# Altium PCB motorcontroller updated (1).PcbDoc
Units mil, origin at the board's own origin, x right, y up, seen from the top; angles counter-clockwise.
Board outline 3211.75 x 2684.86 mil, 2 copper layers (Top Layer, Bottom Layer), stack 15.3 mil thick; 36 components, 77 nets, 186 pads, 23 vias.
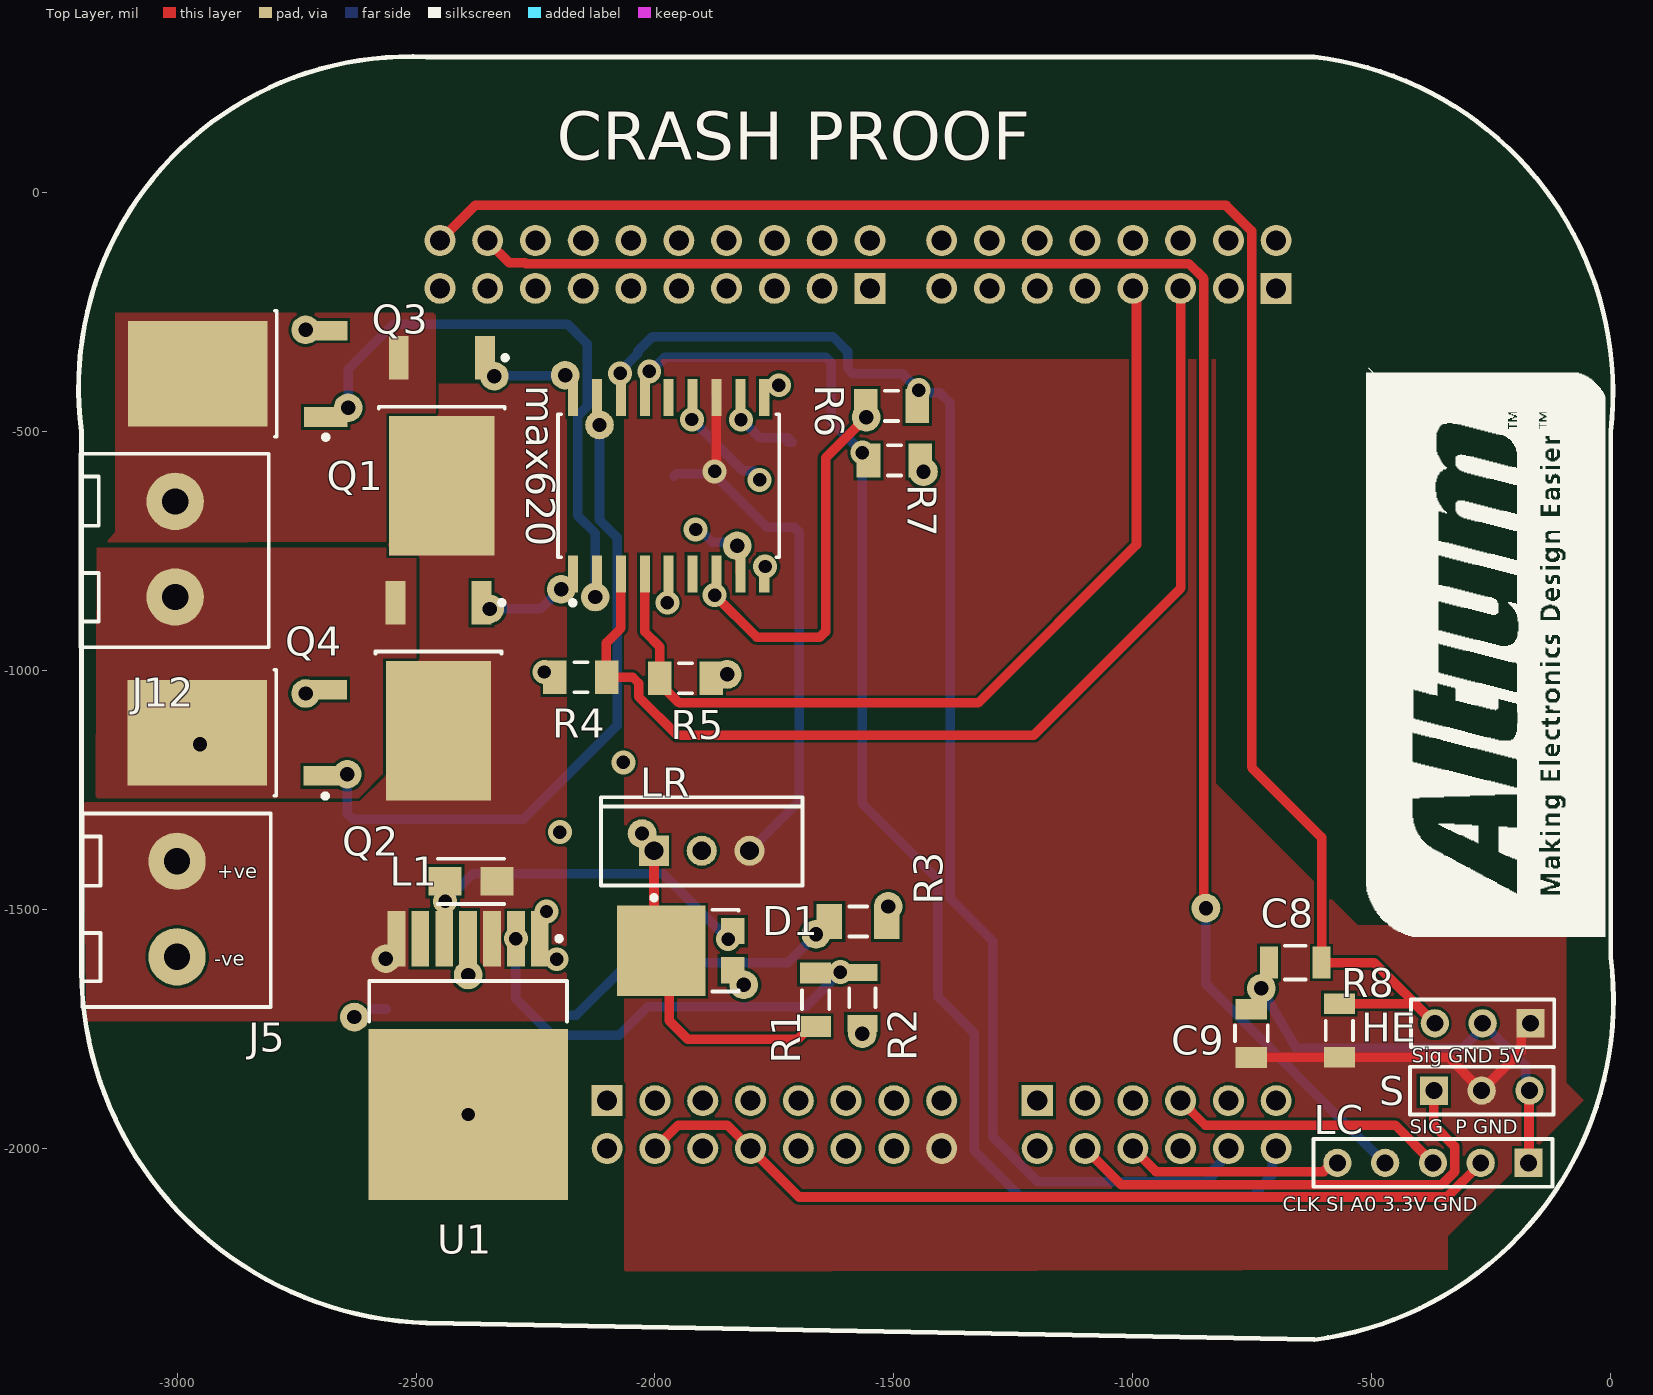
[diagram p0: Top Layer view]
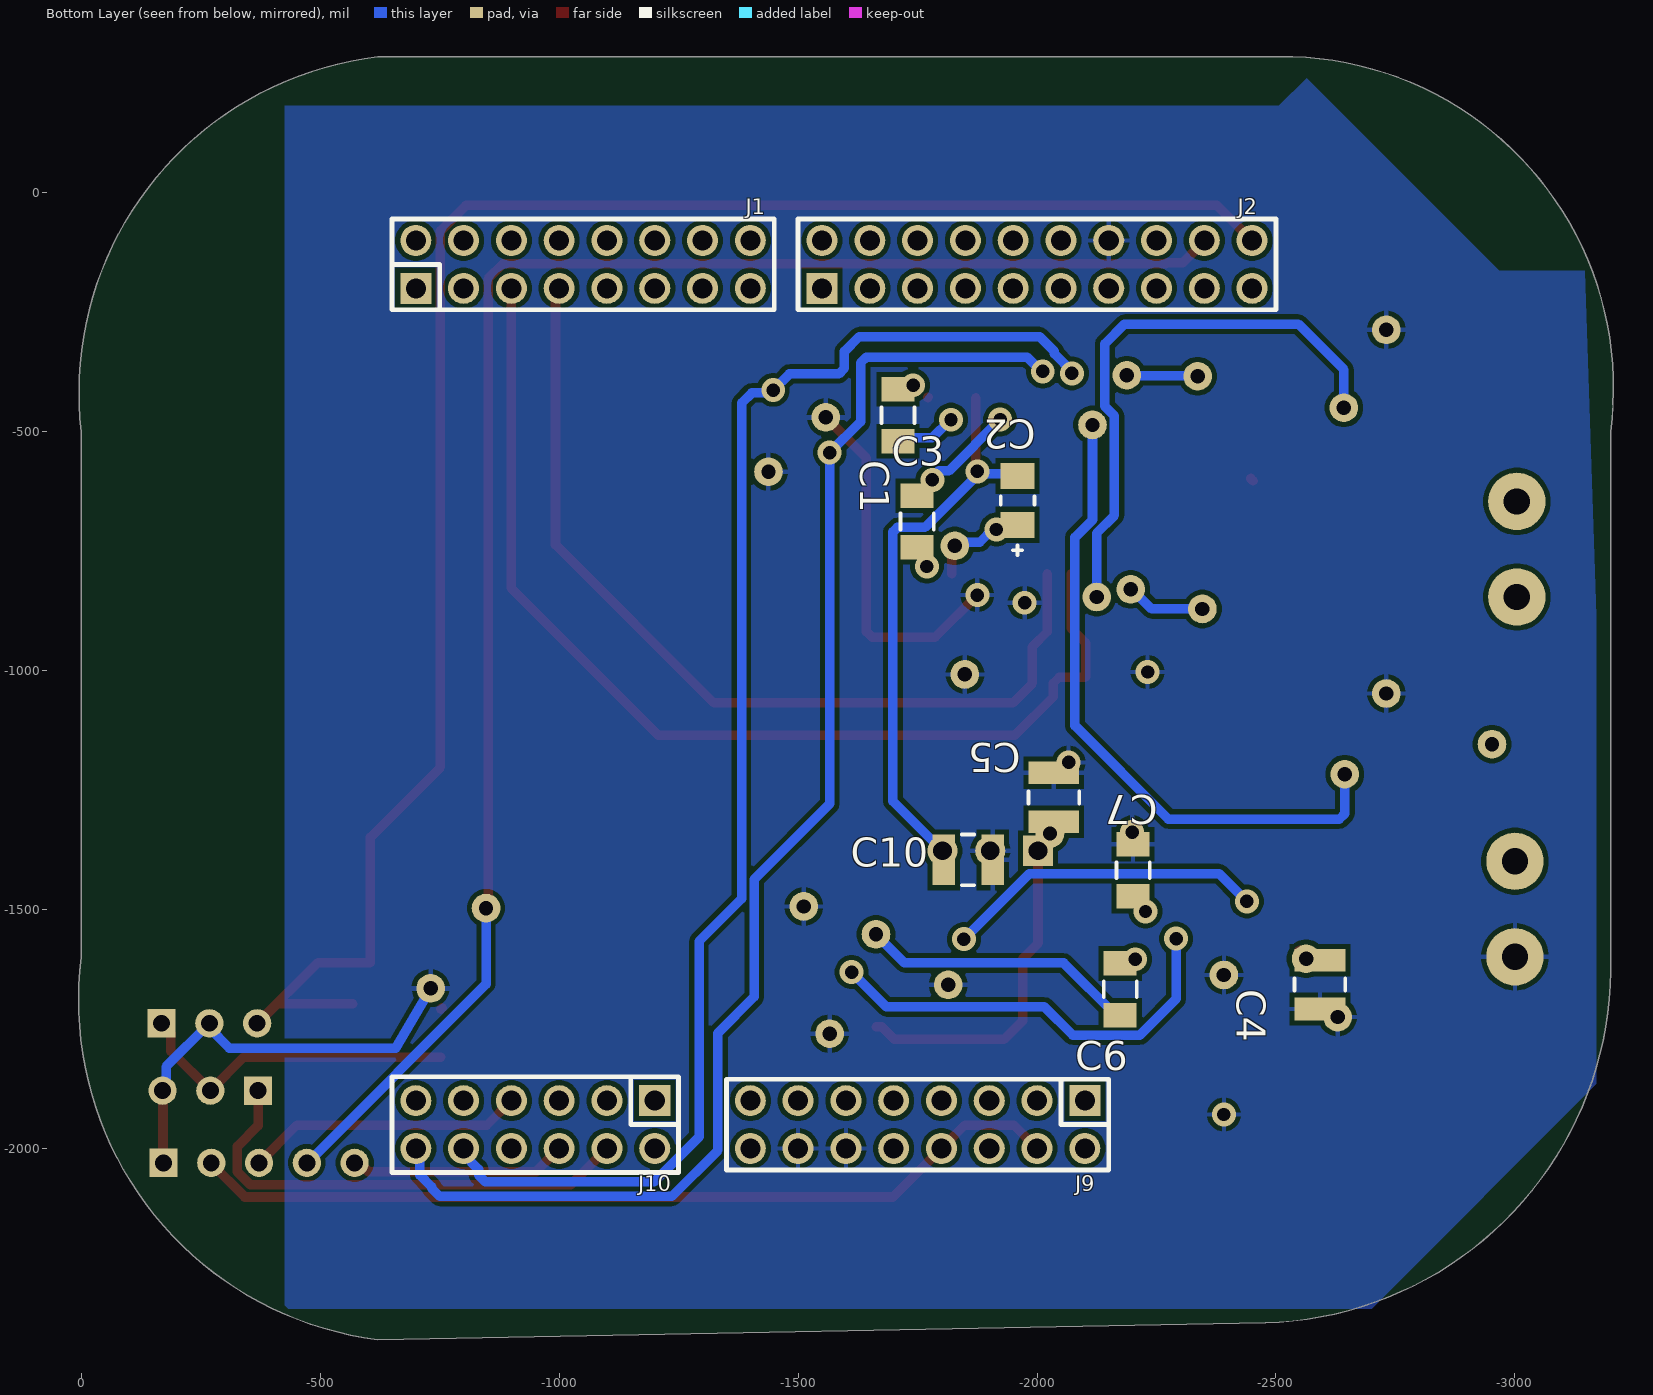
[diagram p1: Bottom Layer view, seen from below]
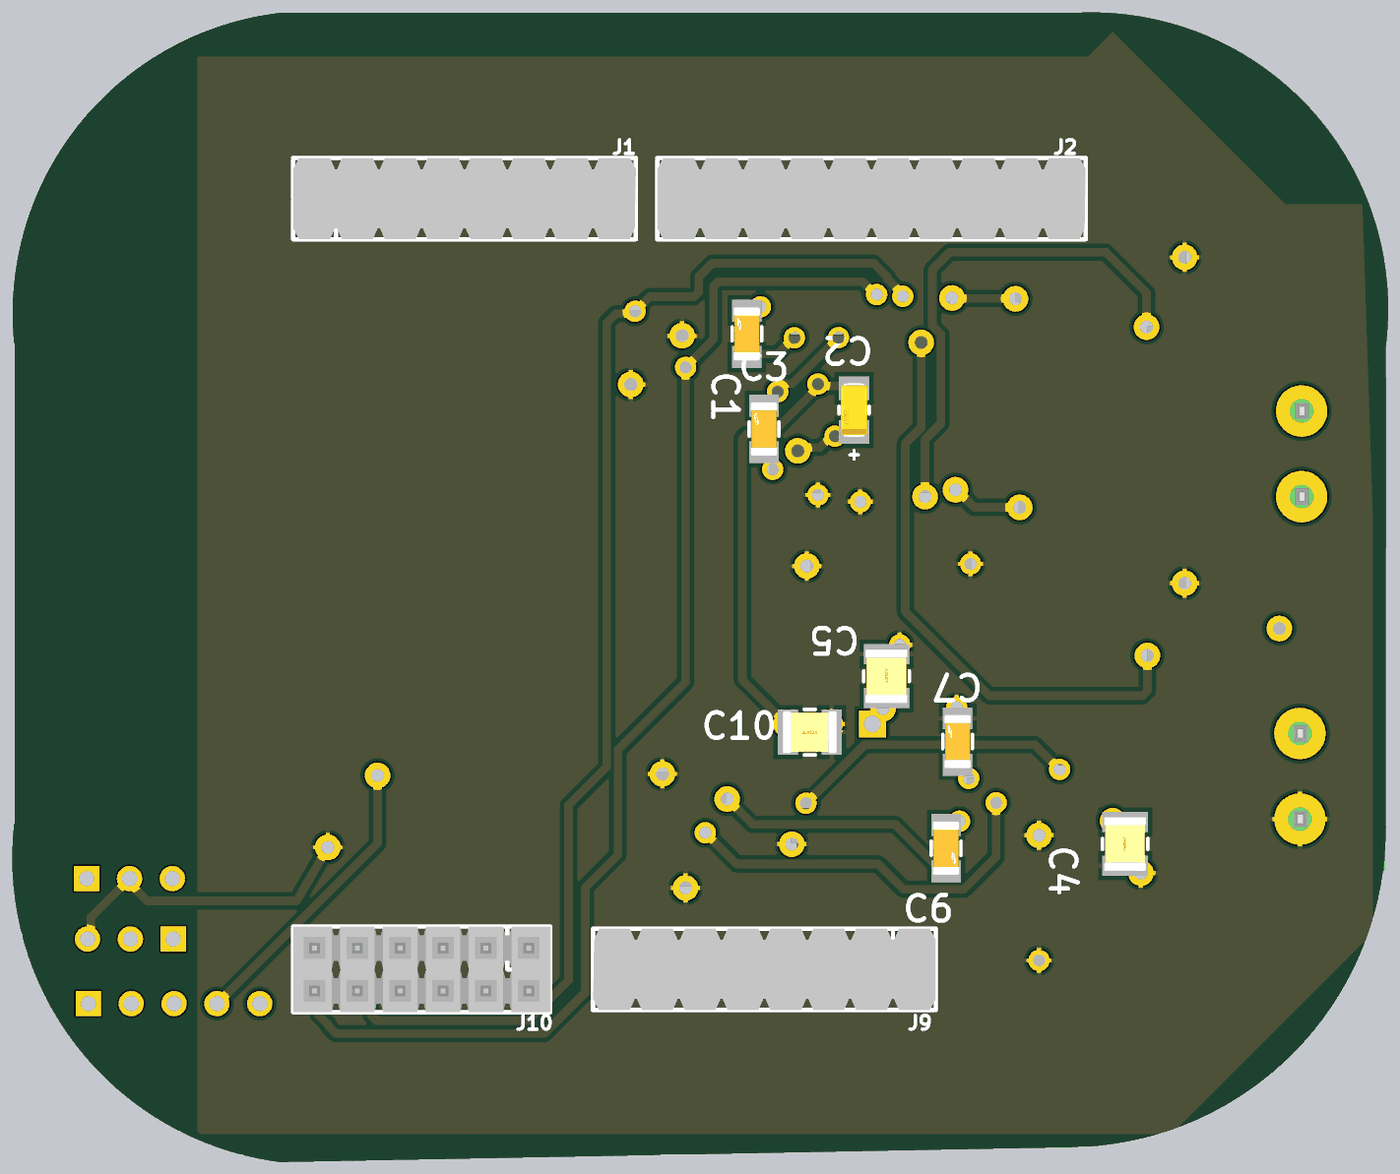
[diagram p2: 3D render of the assembled board from below, using the file's embedded part models]

## Layer stack, top to bottom
Top Solder: solder mask 0.4, Solder Resist, Dk 3.5
Top Layer: signal copper 1.4
Dielectric1: core 12.5, FR-4, Dk 4.8
Bottom Layer: signal copper 1.4
Bottom Solder: solder mask 0.4, Solder Resist, Dk 3.5

## Board outline
-3200,-1600 ccw(c-2456.51,-1621.51) -2478.02,-2365 -620.19,-2400 ccw(c-710.1,-1689.91) 0,-1600 0,-500 ccw(c-702.09,-418.09) -620.19,284 -989,284 -1736,284 -2478.02,284 ccw(c-2513.25,-407.99) -3200,-500

## Design rules (kind name [scope] priority, off if disabled: settings)
Clearance Polygon [(InNet('GND') AND InPoly)] p1: gap=10 ignorepadtopadclearanceinfootprint=FALSE except(0: Arc-Hole Track-Hole SMDPad-Hole THPad-Hole Via-Hole Fill-Hole Poly-Hole Region-Hole Text-Hole)
Clearance [All] p2: gap=6 ignorepadtopadclearanceinfootprint=FALSE except(0: Arc-Hole Track-Hole SMDPad-Hole THPad-Hole Via-Hole Fill-Hole Poly-Hole Region-Hole Text-Hole)
ComponentClearance [All] p1: gap=0 collisioncheckmode=3 verticalgap=0 showdistances=FALSE
Height [All] p1: minheight=0 maxheight=1500 prefheight=500
HoleSize [All] p1: absolutevalues=TRUE maxlimit=250 minlimit=1 maxpercent=80.000 minpercent=20.000
HoleToHoleClearance [All] p1: gap=2 allowstackedmicrovias=TRUE
MinimumSolderMaskSliver [All] p1: minsoldermaskwidth=0
PlaneConnect [All] p1: planeconnectstyle=Direct reliefexpansion=20 reliefentries=4 reliefconductorwidth=10 reliefairgap=10
PolygonConnect PolygonConnect_2 [InNet('GND')] p1: connectstyle=Relief reliefconductorwidth=10 reliefentries=4 polygonreliefangle="90 Angle" airgapwidth=10
PolygonConnect [All] p2: connectstyle=Direct reliefconductorwidth=10 reliefentries=4 polygonreliefangle="90 Angle" airgapwidth=10
RoomDefinition Connectors [InComponentClass('Connectors')] p1: confinementstyle=ConfineIn formatcopy=TRUE lockcomponents=FALSE outline -27484.74,-25608.65 -25484.74,-25608.65 -25484.74,-24608.65 -27484.74,-24608.65
RoutingVias [All] p1: holewidth=12 width=24 viastyle="Through Hole" minholewidth=12 minwidth=24 maxholewidth=50 maxwidth=100
ShortCircuit ShortCircuit_1 [HasFootprint('4-40 X 250') vs HasFootprint('4-40 X 250')] p1: allowed=TRUE
ShortCircuit [All] p2: allowed=FALSE
SilkToSilkClearance [All] p1: silktosilkclearance=0
SilkToSolderMaskClearance SilkscreenOverComponentPads [IsPad] p1: minsilkscreentomaskgap=0 clearancetoexposedcopper=TRUE
SolderMaskExpansion [All] p1: expansion=4 istentingtop=FALSE
Width [All] p1: maxlimit=100 minlimit=20 preferedwidth=20 minimp=50.000000 maximp=50.000000 favimp=50.000000 checkconnectedcopper=TRUE
21 further rules are at their usual default settings.

## Classes and differential pairs
component class "motorcontroller updated": C1 C2 C3 C4 C5 C6 C7 C8 C9 C10 D1 HE J12 L1 LC LR max620 Q1 Q2 Q3 Q4 R1 R2 R3 R4 R5 R6 R7 R8 S U1
component class Connectors: D6 J1 J2 J5 J9 J10 R18

## Components (designator, comment, footprint, x,y, rotation, side; value= is the part's Value field where it differs from the comment)
C1 "CL31B473KCCNNNC" FP-CL31-IPC_B -1709.09,-465.81 r90 bottom
C2 "TAJA105K025RNJ" FP-TAJA-MFG -1959.31,-644 r270 bottom
C3 "CL31B473KCCNNNC" FP-CL31-IPC_B -1749,-688 r90 bottom
C4 "C1210C226K4PACTU" FP-C1210C226K4PACTU-MFG -2592,-1657 r90 bottom
C5 "C1210C226K4PACTU" FP-C1210C226K4PACTU-MFG -2035,-1265.18 r270 bottom
C6 "CL31B473KBCNNNC" FP-CL31-IPC_B -2174,-1667 r270 bottom
C7 "CL31B473KBCNNNC" FP-CL31-IPC_B -2201,-1417.81 r90 bottom
C8 "C1206C472K5RACTU" FP-C1206C-EB-MFG -660,-1611 r180 top value="4,700 pF"
C9 "100nf" FP-CL31-IPC_C -752,-1759.1 r90 top value=100nF
C10 "C1210C226K4PACTU" FP-C1210C226K4PACTU-MFG -1856,-1396 r0 bottom
D1 "V10P10-M3/86A" FP-95570-MFG -1946.06,-1586 r90 top
HE "Header 3" HDR1X3 -168,-1738 r180 top
J1 "67996-416HLF" 67996-416HLF -1050,-150 r180 bottom locked
J2 "67996-420HLF" 67996-420HLF -2000,-150 r180 bottom locked
J5 "282857-2" 282857-2 -3000,-1399 r180 top
J9 "67996-416HLF" 67996-416HLF -1750,-1950 r0 bottom locked
J10 "67996-412HLF" 67996-412HLF -950,-1950 r0 bottom locked
J12 "" 282857-2 -3004,-646 r180 top value=282857-2
L1 "LQH31CN100K03L" FP-LQH31CN_03-MFG -2385,-1441 r180 top
LC "Header 5" HDR1X5 -172,-2030 r180 top
LR "LM2940CT-5.0/NOPB" NDE0003A -1902,-1377 r0 top
max620 "MAX620CWN+" FP-W18-1-MFG -1971.31,-613.18 r90 top
Q1 "" INF-PG-TO252-3-11_A_M -2446,-530.32 r270 top
Q2 "" INF-PG-TO252-3-11_A_M -2453,-1043 r270 top
Q3 "" INF-PG-TO252-3-11_A_M -2874,-379 r180 top
Q4 "" INF-PG-TO252-3-11_A_M -2875,-1130 r180 top
R1 "ERJ-8ENF53R6V" RESC3216X70X50NL05T20 -1664,-1688.85 r270 top
R2 "CRCW12066K80FKEA" RESC3216X60X45LL10T20 -1566,-1685 r270 top
R3 "CRCW12062K00FKEA" FP-CRCW1206-e3-IPC_A -1574.92,-1525 r0 top value=2kR
R4 "CRCW120610K0FKEAHP" RESC3116X65X50NL20T20 -2155.13,-1014 r180 top
R5 "CRCW120610K0FKEAHP" RESC3116X65X50NL20T20 -1936,-1016 r180 top
R6 "CRCW120610K0FKEAHP" RESC3116X65X50NL20T20 -1505,-446 r0 top
R7 "CRCW120610K0FKEAHP" RESC3116X65X50NL20T20 -1499,-560 r0 top
R8 "ERJ8ENF2201V" RESC3216X70X50NL05T20 -568,-1753.1 r270 top
S "Header 3" HDR1X3 -370,-1879 r0 top
U1 "LT1370CR#PBF" LT-R-7_L -2391,-1805 r270 top

## Footprints (in the part's own frame and the unit in brackets; to place one, negate y for a bottom-side part, rotate by r counter-clockwise, add the part's x,y. Pads: shape width x height; smd on the part's side, far side on the other; paste and mask are expansions set on the pad)
67996-412HLF [mil] "CONN HEADER 12POS .100 STR TIN"
  rect 65x65 hole 42: 1(-250,-50)
  round 65 hole 42: 2(-250,50) 3(-150,-50) 4(-150,50) 5(-50,-50) 6(-50,50) 7(50,-50) 8(50,50) 9(150,-50) 10(150,50) 11(250,-50) 12(250,50)
  silkscreen extent -300,-100 300,100, body extent -300,-100 300,100, height 331
67996-416HLF [mil] "CONN HEADER 16POS .100 STR TIN"
  rect 65x65 hole 42: 1(-350,-50)
  round 65 hole 42: 2(-350,50) 3(-250,-50) 4(-250,50) 5(-150,-50) 6(-150,50) 7(-50,-50) 8(-50,50) 9(50,-50) 10(50,50) 11(150,-50) 12(150,50) 13(250,-50) 14(250,50) 15(350,-50) 16(350,50)
  silkscreen extent -400,-95 400,95, body extent -400,-95 400,95, height 305
67996-420HLF [mil] "CONN HEADER 20POS .100 STR TIN"
  rect 65x65 hole 42: 1(-450,-50)
  round 65 hole 42: 2(-450,50) 3(-350,-50) 4(-350,50) 5(-250,-50) 6(-250,50) 7(-150,-50) 8(-150,50) 9(-50,-50) 10(-50,50) 11(50,-50) 12(50,50) 13(150,-50) 14(150,50) 15(250,-50) 16(250,50) 17(350,-50) 18(350,50) 19(450,-50) 20(450,50)
  silkscreen extent -500,-95 500,95, body extent -500,-95 500,95, height 305
282857-2 [mil] "TE CONNECTIVITY / BUCHANAN  282857-2  Wire-To-Board Terminal Block, 2, 300 V, 24 A, 30 AWG, 12 AWG, 3 mm²"
  round 120 hole 55: 1(0,0) 2(0,200)
  silkscreen extent -196,-100 198,305, body extent -196,-100 198,320, height 752
FP-95570-MFG [mm]
  rect 1.4x1.27 smd paste+0 mask+0: 1(1.04,-2.765) 2(-1.04,-2.765)
  rect 4.8x4.72 smd paste+0 mask+0: K(0,1.04)
  silkscreen extent -2.17,-3.08 2.17,-1.7, body extent -2.5,-3.5 2.5,3.5, height 0.25
FP-C1206C-EB-MFG [mm]
  rect 0.95x1.7 smd paste+0 mask+0: 1(-1.4,0) 2(1.4,0)
  silkscreen extent -0.55,-0.9 0.55,0.9, body extent -2,-1 2,1, height 0.25
FP-C1210C226K4PACTU-MFG [mm]
  rect 1.2x2.7 smd paste+0 mask+0: 1(-1.3,0) 2(1.3,0)
  silkscreen extent -0.33,-1.35 0.33,1.35, body extent -1.6,-1.25 1.6,1.25, height 2.8
FP-CL31-IPC_B [mil]
  rect 51.4x69.22 smd paste+0 mask+0: 1(-54.19,0) 2(54.19,0)
  silkscreen extent -17,-35 17,35, body extent -63,-31 63,31, height 55
FP-CL31-IPC_C [mil]
  rect 43.52x65.28 smd paste+0 mask+0: 1(-50.25,0) 2(50.25,0)
  silkscreen extent -17,-34 17,34, body extent -76,-38 76,38, height 10
FP-CRCW1206-e3-IPC_A [mil]
  rect 53.39x73.16 smd paste+0 mask+0: 1(-60.08,0) 2(60.08,0)
  silkscreen extent -19,-31 19,31, body extent -63,-31 63,31, height 24
FP-LQH31CN_03-MFG [mm]
  rect 1.75x1.5 smd paste+0 mask+0: 1(-1.375,0) 2(1.375,0)
  silkscreen extent -1.75,-1.2 1.75,1.2, body extent -2.35,-1 2.35,1, height 0.25
FP-TAJA-MFG [mm]
  rect 1.4x1.8 smd paste+0 mask+0: 1(-1.3,0) 2(1.3,0)
  silkscreen extent -0.23,-0.9 2.9,0.9, body extent -1.6,-0.8 1.6,0.8, height 1.8
FP-W18-1-MFG [mil]
  rect 77.99x20.98 smd paste+0 mask+0: 1(-184.51,200) 2(-184.51,150) 3(-184.51,100) 4(-184.51,50) 5(-184.51,0) 6(-184.51,-50) 7(-184.51,-100) 8(-184.51,-150) 9(-184.51,-200) 10(184.51,-200) 11(184.51,-150) 12(184.51,-100) 13(184.51,-50) 14(184.51,0) 15(184.51,50) 16(184.51,100) 17(184.51,150) 18(184.51,200)
  silkscreen extent -250,-231 150,231, body extent -227,-238 227,238, height 10
HDR1X3 [mm] "Connector; Header; 3 Position"
  rect 1.5x1.5 hole 0.9: 1(0,0)
  round 1.5 hole 0.9: 2(2.54,0) 3(5.08,0)
  silkscreen extent -1.27,-1.27 6.35,1.27
HDR1X5 [mm] "Connector; Header; 5 Position"
  rect 1.5x1.5 hole 0.9: 1(0,0)
  round 1.5 hole 0.9: 2(2.54,0) 3(5.08,0) 4(7.62,0) 5(10.16,0)
  silkscreen extent -1.27,-1.27 11.43,1.27
INF-PG-TO252-3-11_A_M [mm] "DPAK, 3-Leads, Body 6.57x6.1mm, Pitch 2.29mm, IPC Low Density"
  rect 2.3x1.05 smd: 1(-4.7,2.29) 3(-4.7,-2.29)
  rect 7.4x5.6 smd: 2(2.1,0)
  silkscreen extent -4.82,-3.35 -2,3.49, body extent -2.1,-3.37 4.12,3.37, height 2.41
LT-R-7_L [mm] "DPAK, 7-Leads, Body 10.224x8.89mm, Pitch 1.27mm, IPC High Density"
  rect 2.95x0.95 smd: 1(-6.2,3.81) 2(-6.2,2.54) 3(-6.2,1.27) 4(-6.2,0) 5(-6.2,-1.27) 6(-6.2,-2.54) 7(-6.2,-3.81)
  rect 9.1x10.6 smd: 8(3.15,0)
  silkscreen extent -6.32,-5.25 -1.8,5.25, body extent -3.95,-5.28 5.45,5.28, height 4.58
NDE0003A [mm] "FM, 3-Leads, Body 10.7x4.7mm, Pitch 2.54mm"
  rect 1.6x1.6 hole 1: 1(-2.54,0)
  round 1.6 hole 1: 2(0,0) 3(2.54,0)
  silkscreen extent -5.35,-2.62 5.35,2.85, body extent -5.4,-1.9 5.4,2.9, height 19.4
RESC3116X65X50NL20T20 [mm] "Chip Resistor, 2-Leads, Body 3.10x1.60mm, IPC Medium Density"
  rect 1.25x1.8 smd: 1(-1.375,0) 2(1.375,0)
  silkscreen extent -0.35,-0.8 0.35,0.8, body extent -1.65,-0.9 1.65,0.9, height 0.65
RESC3216X60X45LL10T20 [mm] "Chip Resistor, 2-Leads, Body 3.20x1.60mm, IPC High Density"
  rect 0.9x1.6 smd: 1(-1.35,0) 2(1.35,0)
  silkscreen extent -0.5,-0.7 0.5,0.7, body extent -1.65,-0.85 1.65,0.85, height 0.6
RESC3216X70X50NL05T20 [mm] "Chip Resistor, 2-Leads, Body 3.20x1.60mm, IPC Medium Density"
  rect 1.1x1.65 smd: 1(-1.425,0) 2(1.425,0)
  silkscreen extent -0.5,-0.72 0.5,0.72, body extent -1.63,-0.82 1.62,0.82, height 0.7

## Part data
C1 C3: library part CMP-13271-001626-1, "Cap Ceramic 47nF 100V X7R ±10% SMD 1206 +125°C Embossed T/R", Capacitance=47nF, Case Code (Imperial)=1206, Case Code (Metric)=3216, Dielectric=X7R, Max Operating Temperature=125°C, Min Operating Temperature=-55°C, Package Quantity=1, Tolerance=10%, Voltage=63V, Voltage Rating=100V, Case/Package=1206, Depth=1.6mm, Height=0.85mm, Length=3.2mm, Material=Ceramic, Mount="Surface Mount", Packaging="Tape and Reel", Radiation Hardening=No, Thickness=0.039inch, Width=0.063inch
C2: library part CMP-04424-000374-1, "1uF 25V  ±10% 8Ω 1206  SMD Tantalum Capacitor", Capacitance=1uF, Case Code (Imperial)=1206, Case Code (Metric)=3216, Dielectric=X7R, Dielectric Material=Tantalum, ESR (Equivalent Series Resistance)=8R, Leakage Current=500nA, Max Operating Temperature=125°C, Min Operating Temperature=-55°C, Package Quantity=1, Tolerance=20%, Voltage=25V, Case/Package=1206, Construction=Flat, Depth=1.6mm, Dissipation Factor=4%, Features="General Purpose", Height=1.6mm, Height - Seated (Max)=0.071inch, Lead Free="Lead Free", Length=3.2mm, Mount="Surface Mount", Number of Pins=2, Packaging="Tape and Reel", Polarity=Polar, Radiation Hardening=No, REACH SVHC="No SVHC", RoHS Compliant=Yes, Series=TAJ, Termination=SMD/SMT, Voltage Rating=25V, Voltage Rating (DC)=25V, Weight=0.000571oz, Width=1.6mm
C4 C5 C10: library part CMP-03020-034645-1, "CAP CER 22UF 16V X5R 1210", Capacitance=22uF, Case Code (Imperial)=1210, Case Code (Metric)=3225, Dielectric=X5R, Dielectric Material=Ceramic, Max Operating Temperature=85°C, Min Operating Temperature=-55°C, Tolerance=10%, Voltage=16V, Case/Package=1210, Construction=Flat, Depth=2.5mm, Height=1.85mm, Lead Free="Lead Free", Length=3.2mm, Mount="Surface Mount", Packaging="Tape and Reel", Radiation Hardening=No, RoHS Compliant=Yes, Termination=SMD/SMT, Voltage Rating=16V, Voltage Rating (DC)=16V
C6 C7: library part CMP-13271-000358-1, "Cap Ceramic 47nF 50V X7R ±10% SMD 1206 +125°C Embossed T/R", Capacitance=47nF, Case Code (Imperial)=1206, Case Code (Metric)=3216, Dielectric=X7R, Max Operating Temperature=125°C, Min Operating Temperature=-55°C, Tolerance=10%, Voltage=50V, Case/Package=1206, Depth=1.6mm, Height=0.85mm, Lead Free="Lead Free", Length=3.2mm, Material=Ceramic, Mount="Surface Mount", Packaging="Tape and Reel", Radiation Hardening=No, Thickness=0.039inch, Voltage Rating=50V, Voltage Rating (DC)=50V, Width=0.063inch
C8: library part CMP-03020-024307-1, "CAP CER 4700PF 50V X7R 1206", Capacitance="4,700 pF", Manufacturer=KEMET, Package=C1206C-EB, Temperature="-55°C to +150°C", Temperature Characteristic=X7R, Temperature Coefficient=15%, Temperature Range High=+150°C, Temperature Range Low=-55°C, Tolerance=0.1, Voltage Rating="50 V", Automotive=Yes, Automotive Grade="Grade 0", Category=Cap, ComponentLink2Description=Datasheet, ComponentLink2URL=https://content.kemet.com/datasheets/KEM_C1007_X8R_ULTRA_150C_SMD.pdf, Device Class L1="Passive Components", Device Class L2=Capacitors, Device Class L3="Ceramic Capacitors", Digikey Description="CAP CER 4700PF 50V X7R 1206", Height=0.88mm, Ipc Land Pattern Name=CAPC320160X78, Lead Free=Yes, Manufacturer Part Number=C1206C472K5RACTU, Material=Ceramic, Mouser Description="Multilayer Ceramic Capacitors MLCC - SMD/SMT 50volts 4700pF X7R 10%", Octopart=https://octopart.com/c1206c472k5ractu-kemet-104154, RoHS=TRUE
C9: library part CMP-13271-001514-1, "Cap Ceramic 100nF 100V X7R ±10% SMD 1206 +125°C Embossed T/R", Capacitance=100nF, Case Code (Imperial)=1206, Case Code (Metric)=3216, Dielectric=X7R, Manufacturer=Samsung, Manufacturer Part Number=CL31B104KCFNNNE, Max Operating Temperature=125°C, Min Operating Temperature=-55°C, Package Quantity=1, Supplier Part Number=1276-1151-1-ND, Tolerance=10%, Voltage=100V, Case/Package=1206, Category="Ceramic Capacitors", ComponentLink1Description=https://datasheet.ciiva.com/25794/cl31b104kcfnnne-25794789.pdf?src-supplier=Digi-Key, ComponentLink1URL=https://datasheet.ciiva.com/25794/cl31b104kcfnnne-25794789.pdf?src-supplier=Digi-Key, ComponentLink2Description=https://datasheet.ciiva.com/16199/cl31b104kcfnnne-16199426.pdf?src-supplier=Future+Electronics, ComponentLink2URL=https://datasheet.ciiva.com/16199/cl31b104kcfnnne-16199426.pdf?src-supplier=Future+Electronics, ComponentLink3Description=https://datasheet.ciiva.com/26838/getdatasheetpartid-358426-26838891.pdf?src-supplier=Verical, ComponentLink3URL=https://datasheet.ciiva.com/26838/getdatasheetpartid-358426-26838891.pdf?src-supplier=Verical, ComponentLink4Description=https://datasheet.ciiva.com/29201/451915-da-01-en-vs-kondensator-1206-29201844.pdf?src-supplier=Conrad, ComponentLink4URL=https://datasheet.ciiva.com/29201/451915-da-01-en-vs-kondensator-1206-29201844.pdf?src-supplier=Conrad, ComponentLink5Description=https://datasheet.ciiva.com/26310/mlcc-catalogdownload2013-eng-26310106.pdf?src-supplier=Distrelec, ComponentLink5URL=https://datasheet.ciiva.com/26310/mlcc-catalogdownload2013-eng-26310106.pdf?src-supplier=Distrelec, Construction=Flat, Contact Plating=Tin, Depth=1.6mm, Height=1.25mm, Lead Free="Lead Free", Length=3.2mm, Material=Ceramic, Mount="Surface Mount", Mounting Technology="Surface Mount", Packaging="Tape and Reel", Pricing="1=0.12000, 10=0.08400, 50=0.04780, 100=0.03950, 500=0.02772, 1000=0.02295 (USD)", Radiation Hardening=No, RoHS=Yes, RoHS Compliant=Yes, Series=CL, Stock=549, Supplier=Digi-Key, Thickness=0.055inch, Voltage Rating=100V, Voltage Rating (DC)=100V, Width=0.063inch
D1: library part CMP-2000-07483-2, "DIODE SCHOTTKY 100V 10A TO277A", Forward Current=10A, Manufacturer=Vishay, Max Junction Temp=+175°C, Max Repetitive Reverse Voltage=100V, Max Surge Forward Current=180A, Package=95570, Peak Reverse Current=30.4uA, Temperature="-40°C to +175°C", Temperature Range Low=-40°C, Automotive=No, Category=Diode, ComponentLink2Description=Datasheet, ComponentLink2URL=http://www.vishay.com/docs/89006/v10p10.pdf, Device Class L1="Discrete Semiconductors", Device Class L2=Diodes, Device Class L3="Schottky Diodes", Digikey Description="DIODE SCHOTTKY 100V 10A TO277A", Footprint Url=https://www.vishay.com/docs/95570/to-277asmpc.pdf, Height=1.2mm, Lead Free=Yes, Manufacturer Part Number=V10P10-M3/86A, Mouser Description="Diode Schottky 100V 10A 3-Pin(2+Tab) SMPC T/R", Octopart=https://octopart.com/v10p10-m3%2F86a-vishay-42522004, Reverse Voltage=100V, RoHS=TRUE, Temperature Range High=+175°C
HE S: "Header, 3-Pin", LatestRevisionDate=17-Jul-2002, LatestRevisionNote="Re-released for DXP Platform.", Publisher="Altium Limited"
J1 J9: "CONN HEADER 16POS .100 STR TIN", Color=Black, Manufacturer=FCI, Supplier Part Number 1=609-3220-ND, Category="Connectors, Interconnects", ComponentLink1Description=http://portal.fciconnect.com/Comergent//fci/drawing/67996.pdf, ComponentLink1URL=http://portal.fciconnect.com/Comergent//fci/drawing/67996.pdf, Connector Type="Header, Unshrouded", Contact Finish=Tin, Contact Finish Thickness="100µin (2.54µm)", Contact Mating Length="0.230\" (5.84mm)", Contact Type="Male Pin", Fastening Type=-, Features=-, Manufacturer Part Number=67996-416HLF, Mounting Type="Through Hole", Number of Positions=16, Number of Positions Loaded=All, Number of Rows=2, Packaging=Bulk, Pitch="0.100\" (2.54mm)", Pricing 1="1=0.56, 10=0.521, 25=0.4684, 50=0.4164, 100=0.3991, 250=0.36436, 500=0.347, 1000=0.28628, 2500=0.26025 (USD)", RoHS="RoHS Compliant", Row Spacing="0.100\" (2.54mm)", Stock 1=1589, Supplier 1=Digi-Key, Termination=Solder
J2: "CONN HEADER 20POS .100 STR TIN", Color=Black, Manufacturer=FCI, Supplier Part Number 1=609-3221-ND, Category="Connectors, Interconnects", ComponentLink1Description=http://portal.fciconnect.com/Comergent//fci/drawing/67996.pdf, ComponentLink1URL=http://portal.fciconnect.com/Comergent//fci/drawing/67996.pdf, Connector Type="Header, Unshrouded", Contact Finish=Tin, Contact Finish Thickness="100µin (2.54µm)", Contact Mating Length="0.230\" (5.84mm)", Contact Type="Male Pin", Fastening Type=-, Features=-, Manufacturer Part Number=67996-420HLF, Mounting Type="Through Hole", Number of Positions=20, Number of Positions Loaded=All, Number of Rows=2, Packaging=Bulk, Pitch="0.100\" (2.54mm)", Pricing 1="1=0.66, 10=0.619, 25=0.5572, 50=0.4952, 100=0.4745, 250=0.43324, 500=0.4126, 1000=0.3404, 2500=0.30945 (USD)", RoHS="RoHS Compliant", Row Spacing="0.100\" (2.54mm)", Stock 1=596, Supplier 1=Digi-Key, Termination=Solder
J5: "TERM BLOCK 2POS SIDE ENT 5.08MM", Color=Green, Current=24A, Manufacturer="TE Connectivity", Operating Temperature=-, Supplier Part Number 1=A98359-ND, Voltage=300V, Category="Connectors, Interconnects", Clamp Material - Plating="Brass - Nickel Plated", ComponentLink1Description=http://documents.tycoelectronics.com/commerce/DocumentDelivery/DDEController?Action=srchrtrv&DocNm=282857&DocType=CD&DocLang=EN, ComponentLink1URL=http://documents.tycoelectronics.com/commerce/DocumentDelivery/DDEController?Action=srchrtrv&DocNm=282857&DocType=CD&DocLang=EN, Contact Material - Plating="Brass - Tin Plated", Features="Interlocking (Side)", Housing Material="Polyamide (PA66), Nylon 6/6", Manufacturer Part Number=282857-2, Mating Orientation="Horizontal with Board", Mounting Type="Through Hole", Number of Levels=1, Packaging=Bulk, Pitch="0.200\" (5.08mm)", Positions Per Level=2, Pricing 1="1=1.19, 10=1.046, 25=0.984, 50=0.9432, 100=0.9021, 250=0.82012, 500=0.7381, 1000=0.65608, 2500=0.59457 (USD)", RoHS="RoHS Compliant", Screw Material - Plating="Brass - Nickel Plated", Screw Thread=M3, Stock 1=1811, Supplier 1=Digi-Key, Torque - Screw="0.79 Nm (7.0 Lb-In)", Wire Gauge="12-30 AWG", Wire Termination="Screw - Rising Cage Clamp"
J10: "CONN HEADER 12POS .100 STR TIN", Color=Black, Manufacturer=FCI, Supplier Part Number 1=609-3219-ND, Category="Connectors, Interconnects", ComponentLink1Description=http://portal.fciconnect.com/Comergent//fci/drawing/67996.pdf, ComponentLink1URL=http://portal.fciconnect.com/Comergent//fci/drawing/67996.pdf, Connector Type="Header, Unshrouded", Contact Finish=Tin, Contact Finish Thickness="100µin (2.54µm)", Contact Mating Length="0.230\" (5.84mm)", Contact Type="Male Pin", Fastening Type=-, Features=-, Manufacturer Part Number=67996-412HLF, Mounting Type="Through Hole", Number of Positions=12, Number of Positions Loaded=All, Number of Rows=2, Packaging=Bulk, Pitch="0.100\" (2.54mm)", Pricing 1="1=0.4, 10=0.379, 25=0.3248, 50=0.276, 100=0.2651, 250=0.23804, 500=0.22722, 1000=0.18935, 2500=0.17312 (USD)", RoHS="RoHS Compliant", Row Spacing="0.100\" (2.54mm)", Stock 1=1044, Supplier 1=Digi-Key, Termination=Solder
J12: library part 282857-2, "Buchanan, Terminal Block Connector, 2 Position, 5.08 mm, 24A, 300 VAC, 30 to 12 AWG", Color=Green, Current=24A, Flammability Rating="UL94 V-0", Manufacturer="TE Connectivity", Max Supply Voltage (AC)=250V, Operating Temperature=-, Package Quantity=300, Supplier Part Number=571-282857-2, Supplier Part Number 1=A98359-ND, Voltage=300V, Category="Connectors, Interconnects", Clamp Material - Plating="Brass - Nickel Plated", Closed End="No (Without)", ComponentLink1Description=http://documents.tycoelectronics.com/commerce/DocumentDelivery/DDEController?Action=srchrtrv&DocNm=282857&DocType=CD&DocLang=EN, ComponentLink1URL=http://documents.tycoelectronics.com/commerce/DocumentDelivery/DDEController?Action=srchrtrv&DocNm=282857&DocType=CD&DocLang=EN, ComponentLink2Description=https://datasheet.ciiva.com/16305/eng-cs-1308389-eurostyle-terminal-blocks-0607-16305272.pdf?src-supplier=Future+Electronics, ComponentLink2URL=https://datasheet.ciiva.com/16305/eng-cs-1308389-eurostyle-terminal-blocks-0607-16305272.pdf?src-supplier=Future+Electronics, ComponentLink3Description=https://datasheet.ciiva.com/823/eng-cd-282857-f1-823459.pdf?src-supplier=Digi-Key, ComponentLink3URL=https://datasheet.ciiva.com/823/eng-cd-282857-f1-823459.pdf?src-supplier=Digi-Key, Connector Type=Receptacle, Contact Material=Brass, Contact Material - Plating="Brass - Tin Plated", Contact Plating=Tin, Current Rating=24A, Depth=10mm, Features="Interlocking (Side)", Gender=Female, Housing Color=Green, Housing Material="Polyamide (PA66), Nylon 6/6", Interlock="Yes (With)", Length=10.16mm, Manufacturer Part Number=282857-2, Material=Nylon, Mating Orientation="Horizontal with Board", Max Current Rating=24A, Max Voltage Rating (AC)=250V, Mounting Technology="Through Hole", Mounting Type="Through Hole", Number of Circuits=2, Number of Contacts=2, Number of Levels=1, Number of Poles=2, Number of Positions=2, Number of Positions Per Level=2, Number of Rows=1, Orientation=Straight, Packaging=Bulk, Pitch="0.200\" (5.08mm)", Plating=Brass, Positions Per Level=2, Pricing="1=1.77000, 10=1.34000, 50=1.34000, 100=1.09000, 1000=0.87100, 10000=0.69400 (USD)", Pricing 1="1=1.19, 10=1.046, 25=0.984, 50=0.9432, 100=0.9021, 250=0.82012, 500=0.7381, 1000=0.65608, 2500=0.59457 (USD)", Radiation Hardening=No, RoHS="RoHS Compliant", RoHS Compliant=Yes, Screw Flange="No (Without)", Screw Material - Plating="Brass - Nickel Plated", Screw Thread=M3, Screwless Terminal Block="Yes (With)", Series=Buchanan, Side Stackable="Yes (With)", Stock=10247, Stock 1=1811, Supplier=Mouser, Supplier 1=Digi-Key, Tail Length=3.5mm, Termination=Screw, Thread Size=M3, Torque - Screw="0.79 Nm (7.0 Lb-In)", Voltage Rating=300V, Voltage Rating (AC)=300V, Width=10mm, Wire Gauge="12-30 AWG", Wire Gauge (Max)=30AWG, Wire Gauge (Min)=30AWG, Wire Termination="Screw - Rising Cage Clamp", Wire/Cable Gauge=30AWG
L1: library part CMP-06042-011996-1, "Wire Wound Ferrite Inductor for Power Lines 10μH ±10% 1.69Ω 230mA 1206", Case Code (Imperial)=1206, Case Code (Metric)=3216, Current=340mA, Current Rating=230mA, DC Resistance (DCR)=1.3R, Inductance=10uH, Inductance Tolerance=10%, Max Operating Temperature=85°C, Min Operating Temperature=-25°C, Package Quantity=2000, Resistor Type=Wirewound, Self Resonant Frequency=20MHz, Test Frequency=1MHz, Case/Package=1206, Core Material=Ferrite, DC Current=230mA, Depth=1.8mm, Height=1.8mm, Height - Seated (Max)=0.079inch, Lead Free="Lead Free", Length=3.5mm, Max DC Current=230mA, Military Standard=Not, Mount="Surface Mount", Number of Pins=2, Packaging="Tape and Reel", Radiation Hardening=No, REACH SVHC="No SVHC", Shielding=Unshielded, Termination=SMD/SMT, Tolerance=10%, Weight=0.001023oz, Width=1.6mm
LC: "Header, 5-Pin", LatestRevisionDate=17-Jul-2002, LatestRevisionNote="Re-released for DXP Platform.", Publisher="Altium Limited"
LR: library part CMP-0062-02545-3, "1A Low Dropout Regulator, 3-pin TO-220, Pb-Free", Manufacturer="Texas Instruments", PackageTopMarking="NSUZXYTTE#*LM2940CT*-5.0 P+", PowerWise=N, ComponentLink1Description="Datasheet URL", ComponentLink1URL=http://www.ti.com/general/docs/lit/getliterature.tsp?genericPartNumber=LM2940C&fileType=pdf, CompType="LDO IC", PackageDescription="TO-220, Molded, 3 Lead, Straight", PackageReference=NDE0003A, PinCount=3, RoHS=Y
max620: library part CMP-05716-000008-1, "IC GATE DRVR HIGH-SIDE 18SOIC", Case/Package=SOIC, Max Operating Temperature=70°C, Max Output Current=25mA, Max Power Dissipation=762mW, Max Supply Current=500uA, Max Supply Voltage=16.5V, Min Operating Temperature=0°C, Min Supply Voltage=4.5V, Package Quantity=40, Fall Time=2500ns, Lead Free="Lead Free", Mount="Surface Mount", Nominal Supply Current=500uA, Number of Drivers=4, Number of Outputs=4, Number of Pins=18, Packaging=Rail/Tube, Radiation Hardening=No, Rise Time=1700ns, RoHS Compliant=Yes, Series=-, Supply Current=500uA
Q1 Q2 Q3 Q4: library part CMP-1090-00096-1, "N-Channel OptiMOS 3 Power-Transistor, 30 V VDS, 50 A ID, -55 to 175 degC, PG-TO252-3-11, Reel, Green", Case/Package=TO-252-3, Continuous Drain Current (ID)=50A, Drain To Source Breakdown Voltage=30V, Drain To Source Resistance=6mR, Gate to Source Voltage (Vgs)=20V, Input Capacitance=2.4nF, Manufacturer=Infineon, Manufacturer Part Number=IPD060N03LG, Max Operating Temperature=175°C, Max Power Dissipation=56W, Min Operating Temperature=-55°C, Package Quantity=2500, PartNumber="IPD060N03L G", Supplier Part Number=IPD060N03LGATMA1CT-ND, Threshold Voltage=10V, Category=Uncategorized, ComponentLink1Description="Manufacturer URL", ComponentLink1URL=http://www.infineon.com/, ComponentLink2Description=Datasheet, ComponentLink2URL=http://www.infineon.com/dgdl/IPD060N03LG_rev2.pdf?folderId=db3a304313b8b5a60113cee8763b02d7&fileId=db3a30432313ff5e01239e4d33a3702f, ComponentLink3Description="Package Specification", ComponentLink3URL=http://www.infineon.com/dgdl/IPD160N04L_rev1.0.pdf?folderId=db3a3043163797a6011643468e7505a4&fileId=db3a3043163797a60116436401cf05cf, ComponentLink4Description=https://datasheet.ciiva.com/13043/ipd060n03lg-rev1-03-93749-13043603.pdf?src-supplier=Mouser, ComponentLink4URL=https://datasheet.ciiva.com/13043/ipd060n03lg-rev1-03-93749-13043603.pdf?src-supplier=Mouser, ComponentLink5Description=https://datasheet.ciiva.com/25625/0900766b810908f2-25625241.pdf?src-supplier=Rs, ComponentLink5URL=https://datasheet.ciiva.com/25625/0900766b810908f2-25625241.pdf?src-supplier=Rs, ComponentLink6Description=https://datasheet.ciiva.com/940/ipd-f-s-u060n03l-g-940947.pdf?src-supplier=Digi-Key, ComponentLink6URL=https://datasheet.ciiva.com/940/ipd-f-s-u060n03l-g-940947.pdf?src-supplier=Digi-Key, ComponentLink7Description=https://datasheet.ciiva.com/940/ipd-f-s-u060n03l-g-940948.pdf?src-supplier=Digi-Key, ComponentLink7URL=https://datasheet.ciiva.com/940/ipd-f-s-u060n03l-g-940948.pdf?src-supplier=Digi-Key, ComponentLink8Description=https://datasheet.ciiva.com/940/ipd-f-s-u060n03l-g-940949.pdf?src-supplier=Digi-Key, ComponentLink8URL=https://datasheet.ciiva.com/940/ipd-f-s-u060n03l-g-940949.pdf?src-supplier=Digi-Key, ComponentLink9Description=https://datasheet.ciiva.com/11172/infineon-ipd060n03lg-ds-v02-01-en-11172172.pdf?src-supplier=Avnet, ComponentLink9URL=https://datasheet.ciiva.com/11172/infineon-ipd060n03lg-ds-v02-01-en-11172172.pdf?src-supplier=Avnet, ComponentLink10Description=https://datasheet.ciiva.com/8076/1859015-8076469.pdf?src-supplier=Element14, ComponentLink10URL=https://datasheet.ciiva.com/8076/1859015-8076469.pdf?src-supplier=Element14, DatasheetVersion="Rev. 2.0", Drain to Source Voltage (Vdss)=30V, Fall Time=3ns, Green=TRUE, Halogen Free="Halogen Free", Halogen-free=TRUE, Height=2.41mm, ID (max)="50Â A", IDpuls (max)="350Â A", Length=6.73mm, Mounting Technology="Surface Mount", PackageDescription="3-Pin Plastic (Green) Transistor Single Outline Package, 6.57 x 6.1 mm Body, 2.29 mm Pitch", PackageReference=PG-TO252-3-11, PackageVersion="Rev. 02, 03/2007", Packaging="Tape and Reel", Packing=Reel, Pins=3, Polarity=N, Power Dissipation=56W, Pricing="1=0.99000, 10=0.88700, 100=0.69120, 500=0.57096, 1000=0.45076 (USD)", Ptot (max)="56Â W", QG="11.3Â nC", RDS (on) (max)="6Â mOhm", RDS (on) (max) (@4.5V)="9Â mOhm", Rds On Max=6mR, Reach SVHC Compliant=No, Rise Time=3ns, RoHS=Yes, RoHS Compliant=Yes, Rth="2.7Â K/W", RthJA (max)="75Â K/W", RthJC (max)="2.7Â K/W", Series=OptiMOS™, Stock=3827, Supplier=Digi-Key, Turn-Off Delay Time=20ns, Turn-On Delay Time=5ns, VDS (max)="30Â V", VGS(th) (max)="2.2Â V", VGS(th) (min)="1Â V", Width=6.22mm
R1: library part CMP-2003-00419-1, Manufacturer=Panasonic, Part Number=ERJ-8ENF53R6V
R2: library part CMP-2003-02358-1, Manufacturer="Vishay Dale", Part Number=CRCW12066K80FKEA
R3: library part CMP-1014-00542-3, "RES Thick Film, 2kΩ, 1%, 0.25W, 100ppm/°C, 1206", Case Code (Imperial)=1206, Case Code (Metric)=3216, Manufacturer=Vishay, Max Operating Temperature=155°C, Max Power Dissipation=250mW, Min Operating Temperature=-55°C, Package Quantity=10, Resistance=2kR, Resistance Tolerance=1%, Resistor Type="Thick Film", Supplier Part Number=541-2.00KFCT-ND, Temperature Coefficient=100ppm/°C, Voltage Rating=200V, Case/Package=1206, Category="Chip SMD Resistors", ComponentLink1Description=https://datasheet.ciiva.com/11811/0900766b80d98b5e-11811442.pdf?src-supplier=Rs, ComponentLink1URL=https://datasheet.ciiva.com/11811/0900766b80d98b5e-11811442.pdf?src-supplier=Rs, ComponentLink2Description=https://datasheet.ciiva.com/2468/dcrcwe3-2468916.pdf?src-supplier=Digi-Key, ComponentLink2URL=https://datasheet.ciiva.com/2468/dcrcwe3-2468916.pdf?src-supplier=Digi-Key, ComponentLink3Description=https://datasheet.ciiva.com/2468/dcrcwe3-2468917.pdf?src-supplier=Digi-Key, ComponentLink3URL=https://datasheet.ciiva.com/2468/dcrcwe3-2468917.pdf?src-supplier=Digi-Key, ComponentLink4Description=https://datasheet.ciiva.com/2468/dcrcwe3-2468918.pdf?src-supplier=Digi-Key, ComponentLink4URL=https://datasheet.ciiva.com/2468/dcrcwe3-2468918.pdf?src-supplier=Digi-Key, ComponentLink5Description=https://datasheet.ciiva.com/9093/dcrcwe3-9093517.pdf?src-supplier=Avnet, ComponentLink5URL=https://datasheet.ciiva.com/9093/dcrcwe3-9093517.pdf?src-supplier=Avnet, ComponentLink6Description=https://datasheet.ciiva.com/26821/getdatasheetpartid-45709-26821003.pdf?src-supplier=Verical, ComponentLink6URL=https://datasheet.ciiva.com/26821/getdatasheetpartid-45709-26821003.pdf?src-supplier=Verical, ComponentLink7Description=https://datasheet.ciiva.com/16770/70201119-16770157.pdf?src-supplier=Allied+Electronics, ComponentLink7URL=https://datasheet.ciiva.com/16770/70201119-16770157.pdf?src-supplier=Allied+Electronics, ComponentLink8Description=https://datasheet.ciiva.com/7673/1697337-7673390.pdf?src-supplier=Element14, ComponentLink8URL=https://datasheet.ciiva.com/7673/1697337-7673390.pdf?src-supplier=Element14, ComponentLink9Description=https://datasheet.ciiva.com/7673/125364-7673509.pdf?src-supplier=Element14, ComponentLink9URL=https://datasheet.ciiva.com/7673/125364-7673509.pdf?src-supplier=Element14, Composition="Thick Film", Construction=Rectangular, Contact Plating=Tin, Depth=1.6mm, Features="Automotive AEC-Q200", Height=0.55mm, Length=3.2mm, Manufacturer Part Number=CRCW12062K00FKEA, Military Standard=Not, Mount="Surface Mount", Number of Pins=2, Number of Terminations=2, Packaging="Tape and Reel", Pins=2, Power Rating=250mW, Pricing="1=0.10000, 10=0.08000, 100=0.03080, 1000=0.01355, 2500=0.01170 (USD)", Radiation Hardening=No, Reach SVHC Compliant=Unknown, RoHS=Yes, RoHS Compliant=Yes, Series=CRCW, Stock=62926, Supplier=Digi-Key, Technology="THICK FILM", Termination=SMD/SMT, Tolerance=1%, Weight=0.000353oz, Width=1.6mm
R4 R5 R6 R7: library part CMP-2003-04883-1, Manufacturer="Vishay Dale", Part Number=CRCW120610K0FKEAHP
R8: library part CMP-2003-00818-1, Manufacturer=Panasonic, Part Number=ERJ8ENF2201V
U1: library part CMP-0491-01357-1, "500 kHz High Efficiency 6 A Switching Regulator, 7-pin DPAK (R-7), 0 to 125 degC, Pb-Free", Frequency Sync Range="600kHz - 800kHz", Manufacturer="Linear Technology", ComponentLink1Description="Manufacturer URL", ComponentLink1URL=http://www.linear.com/, ComponentLink2Description=Datasheet, ComponentLink2URL=http://cds.linear.com/docs/en/datasheet/1370fs.pdf, ComponentLink3Description="Package Specification", ComponentLink3URL=http://cds.linear.com/docs/en/packaging/05081462_F_R.pdf, Mounting Technology="Surface Mount", Number of Outputs=1, PackageDescription="7-Pin Plastic DD Pak, Body 10.2235 x 8.89 mm, Pitch 1.27 mm", PackageReference=R-7, PackageVersion="Rev. F, 05/2012", PartNumber=LT1370CR#PBF, RoHS=TRUE

## Free pads (board coordinates)
  round 60 hole 30: 6(-1558,-470) 10(-2629,-1725) 11(-2391,-1637) 27(-1828,-739) 32(-2952,-1154) 34(-2731,-287) 35(-2731,-1048) 36(-2642,-450) 37(-2644,-1217) 38(-2196,-830) 39(-2125,-846) 41(-2116,-486) 42(-2188,-382) 43(-2336,-384) 44(-2346,-871) 48(-1814.06,-1657.69) 49(-2563,-1603) 51(-1438,-584) 52(-1566,-1759.8) 53(-1663,-1552) 54(-1511.93,-1493.5) 55(-1849,-1008) 56(-2027,-1341) 58(-731,-1665) 61(-847,-1497)

## Via types
v1: diameter 50, hole 28, Top Layer to Bottom Layer, 23 vias

## Nets (pads, with @x,y where several pads share a name; then routed paths per layer and width w, separated by ;. In a path a pad name is that pad's centre, name@x,y a point inside that pad or via, vN(x,y) a via of type N, cw(c..) or ccw(c..) an arc to the next point about the centre after c; other vN are vias at no path point)
+3.3V: J9.4 J9.8 LC.2 | length 1840.5
  Top Layer w20: J9.4 -1951.5,-1951.5 -1848.5,-1951.5 J9.8 -1698.47,-2101.53 -342.37,-2101.53 -272,-2031.16 LC.2
+5V: C2.1 C9.1 C10.2 HE.1 J9.16 LR.3 max620.12 R8.2 S.2 | length 1876.6
  Top Layer w20: v1(-1875,-583) -1871.81,-579.81 -1871.81,-429.17 max620.12 ; C9.1 -751.93,-1809.28 R8.2 ; R8.2 -339.8,-1809.2 S.2 ; S.2@-271,-1880 S.2 ; HE.1 -187.53,-1757.53 -187.53,-1796.53 S.2
  Bottom Layer w20: C2.1 -1954.41,-587.91 v1@-1879.91,-587.91 ; v1(-1875,-583) -1875,-590.75 -1765.26,-700.49 -1707.76,-700.49 -1698.39,-709.86 -1698.39,-1273.39 LR.3
+V_BATTERY: C4.2 J5.1 L1.1 pad.49 Q1.2 Q2.2 U1.3 U1.7 | length 14.8
  Top Layer w20: pad.49@-2549.7,-1585 -2548,-1586.7 pad.49@-2548,-1592 ; Q1.2@-2452,-603 Q1.2@-2447,-598
GND: C4.1 C5.1 C7.2 C8.2 C9.2 C10.1 D1.2 HE.2 J2.14 J5.2 J9.12 J9.14 LC.1 LR.2 max620.5 max620.7 pad.6 pad.10 pad.11 pad.34 pad.35 pad.48 pad.51 pad.52 pad.54 pad.55 pad.58 Q3.3 Q4.3 R2.2 R3.2 R4.2 R5.1 R6.1 R7.2 S.3 U1.4 U1.8 | length 1686.9
  Top Layer w20: v1(-1875,-842) -1787,-930 -1654.72,-930 -1643,-918.28 -1643,-555 pad.6 ; C9.2@-755.37,-1705.48 C9.2 ; LC.1 -171,-2029 -171,-1880 S.3
  Bottom Layer w20: C4.1 C4.1@-2562.47,-1708.18 ; pad.58 -658.1,-1790 -309.72,-1790 -268,-1748.28 HE.2 -177.47,-1828.53 -177.47,-1871.53 S.3
  other v1: -2391,-1929.02 -2199,-1338 -2066,-1192.18 -2231.27,-1003 -1974,-858
NetC1_1: C1.1 max620.11 | length 135.2
  Bottom Layer w20: v1(-1820,-475) -1818.58,-475 -1780.4,-513.18 -1721.99,-513.18 -1713.18,-522 C1.1@-1722.09,-522
NetC1_2: C1.2 max620.10 | length 0.7
  Top Layer w20: max620.10@-1771.81,-428.18 max620.10
  other v1: -1740.58,-402.82
NetC2_2: C2.2 max620.8 pad.27 | length 137.7
  Top Layer w20: v1(-1914.81,-704.68) v1@-1909.07,-710.42 ; max620.8 max620.8@-1821.31,-769.19
  Bottom Layer w20: v1(-1914.81,-704.68) -1906.7,-704.68 -1880.03,-731.35 -1835.65,-731.35 pad.27
NetC3_1: C3.1 max620.9
  other v1: -1769.31,-782.18
NetC3_2: C3.2 max620.13 | length 198.5
  Top Layer w20: max620.13@-1920.31,-460.67 max620.13@-1919.82,-460.18
  Bottom Layer w20: v1(-1922.81,-474.68) -1815.56,-581.94 -1793.89,-581.94 -1781,-594.83 v1(-1781,-601)
NetC5_2: C5.2 D1.K LR.1 pad.56 R1.2 | length 701.6
  Top Layer w20: LR.1 -2002,-1571 D1.K -1969.64,-1603.36 -1969.64,-1733 -1931.64,-1771 -1700.87,-1771 -1674.83,-1744.95 R1.2
NetC6_1: C6.1 C7.1 U1.1
  other v1: -2205.5,-1604.01 -2227,-1504
NetC6_2: C6.2 pad.53 R3.1 | length 581.1
  Bottom Layer w20: C6.2 -2165.09,-1721.19 -2055.59,-1611.69 -1722.68,-1611.69 pad.53
NetD1_1: D1.1 L1.2 U1.5 | length 672.8
  Bottom Layer w20: v1(-2439,-1483) -2381,-1425 -1984,-1425 v1(-1847,-1562)
NetJ12_1: J12.1 Q1.3 Q3.2
NetJ12_2: J12.2 pad.32 Q2.3 Q4.2
Netmax620_2: max620.2 pad.36 pad.39 Q3.1 | length 1189.9
  Bottom Layer w20: pad.36 -2642,-370.07 -2546.93,-275 -2183,-275 -2142,-316 -2142,-446.95 -2162,-466.95 -2162,-675.29 -2125,-712.29 pad.39
NetR1_1: R1.1 R2.1 U1.2 | length 891.3
  Bottom Layer w20: v1(-2291,-1560.91) -2291,-1687.12 -2215.24,-1762.89 -2074.69,-1762.89 -2015.49,-1703.69 -1684.83,-1703.69 v1(-1612,-1630.85)
OUT1: max620.18 pad.42 pad.43 Q1.1 | length 148.8
  Bottom Layer w20: pad.43 -2335,-383 -2189,-383 pad.42
OUT2: max620.17 pad.37 pad.41 Q4.1 | length 1377.6
  Bottom Layer w20: pad.37 -2644,-1299.28 -2632.28,-1311 -2275,-1311 -2079,-1115 -2079,-721.52 -2116,-684.52 pad.41
OUT4: max620.1 pad.38 pad.44 Q2.1 | length 167
  Bottom Layer w20: pad.44 -2239.85,-871 -2198.85,-830 pad.38
P5V_USB: J9.10
PTA1: J1.2
PTA2: J1.4
PTA4: J1.10
PTA5: J1.12
PTA12: J1.8
PTA13: J2.2
PTA16: J2.9
PTA17: J2.11
PTB0: J10.2
PTB1: J10.4 S.1 | length 1003.7
  Top Layer w20: J10.4 -1024.47,-2075.53 -353.14,-2075.53 -326.47,-2048.86 -326.47,-1995.46 -370,-1951.93 S.1
PTB2: J10.6 LC.5 | length 455.8
  Top Layer w20: J10.6 -951.5,-2048.5 -601.07,-2048.5 -582.57,-2030 LC.5
PTB3: J10.8
PTB8: J9.1
PTB9: J9.3
PTB10: J9.5
PTB11: J9.7
PTC0: J1.3
PTC1: J10.12 max620.15 R7.1 | length 2913.1
  Bottom Layer w20: v1(-2012,-374) -2009,-374 -1979,-344 -1642.72,-344 -1631,-355.72 -1631,-479 v1(-1566,-544) -1566,-1279 -1408,-1437 -1408,-1682.5 -1332,-1758.5 -1332,-2004 -1236,-2100 -749.72,-2100 -733.02,-2083.31 -733.02,-2080.14 -708.61,-2055.73 -708.61,-2008.61 J10.12
PTC2: J10.10 max620.16 R6.2 | length 2954.3
  Bottom Layer w20: v1(-2073,-378) -2073,-373.81 -2036.2,-337.01 -2036.2,-332.06 -2005.15,-301 -1628,-301 -1597,-332 -1597,-367.28 -1585.28,-379 -1482,-379 v1(-1448,-413) -1442.26,-418.74 -1403.26,-418.74 -1382,-440 -1382,-1477.29 -1293,-1566.29 -1293,-1975.59 -1198.59,-2070 -845.72,-2070 -831.57,-2055.86 -831.57,-2043.75 -800,-2012.18 J10.10
PTC3: J1.5 max620.3 R4.1 | length 2252.4
  Top Layer w20: max620.3 -2071.31,-911.31 -2102,-942 -2102,-1013 R4.1 -2046.39,-1014 -2033.88,-1026.51 -2033.88,-1054.92 -1953.8,-1135 -1207,-1135 -900,-828 J1.5
PTC4: J1.7 max620.4 R5.2 | length 1933.4
  Top Layer w20: max620.4 -2021.31,-918.69 -1990.13,-949.87 R5.2 -1990.13,-1026.83 -1949.53,-1067.43 -1323.43,-1067.43 -992.28,-736.28 -992.28,-207.72 J1.7
PTC5: J1.9
PTC6: J1.11
PTC7: J1.1
PTC8: J1.14
PTC9: J1.16
PTC10: J1.13
PTC11: J1.15
PTC12: J2.1
PTC13: J2.3
PTC16: J2.5
PTC17: J2.7
PTD0: J2.6
PTD1: J2.12
PTD2: J2.8
PTD3: J2.10
PTD4: J1.6
PTD5: J2.4
PTD6: J2.17
PTD7: J2.19
PTE0: J2.18 LC.4 pad.61 | length 3528.8
  Top Layer w20: J2.18 -2350,-101.64 -2304.64,-147 -2271.59,-147 -2270.09,-148.5 -882.91,-148.5 -851.5,-179.91 -851.5,-1486.5 pad.61@-851,-1487
  Bottom Layer w20: pad.61 -847,-1656 -473,-2030 LC.4
PTE1: C8.1 HE.3 J2.20 R8.1 | length 3849.4
  Top Layer w20: J2.20 -2376.49,-26.49 -804.92,-26.49 -751.5,-79.91 -751.5,-1202.5 -604.88,-1349.12 C8.1 -495,-1611 HE.3 -370.18,-1738 -411.18,-1697 R8.1
PTE2: J9.9
PTE3: J9.11
PTE4: J9.13
PTE5: J9.15
PTE20: J10.1
PTE21: J10.3
PTE22: J10.5
PTE23: J10.7 LC.3 | length 581.8
  Top Layer w20: J10.7 -848.5,-1951.5 -450.5,-1951.5 LC.3
PTE29: J10.9
PTE30: J10.11
PTE31: J2.13
RESET/PTA20: J9.6
SDA_PTD5: J9.2
VREFH: J2.16
pads on no net: J2.15 max620.6 max620.14 U1.6

## Polygon pours and split planes (outlines as drawn)
+5V on Top Layer "+5V_L01_P041" (solid, remove dead copper, pour order 41): -341,-2254 -341,-2184 -56,-1899 -93,-1862 -93,-1533 -529,-1533 -826,-1236 -826,-349 -2016,-349 -2064,-397 -2064,-2258
+V_BATTERY on Top Layer "+V_BATTERY_L01_P037" (solid, pour order 37): -3189,-1739 -3184.13,-1734.13 -2184.31,-1734.13 -2184.31,-393.69 -2189,-389 -2200,-400 -2583,-400 -2583,-1221 -2638,-1276 -3196,-1276
NetJ12_2 on Top Layer "NETJ12_2_L01_P036" (solid, pour order 36): -3170.28,-1267 -2620,-1267 -2499,-1146 -2499,-743 -3167.82,-743
NetJ12_1 on Top Layer "NETJ12_1_L01_P035" (solid, pour order 35): -3150.05,-732.05 -3129,-711 -3129,-251 -2464,-251 -2459,-256 -2459,-730
GND on Bottom Layer "GND_L02_P039" (solid, pour order 39): -3146,-163 -2967,-163 -2564,240 -2506,182 -426,182 -426,-2328 -433,-2335 -2700,-2335 -3170,-1865 -3170,-887

## Silkscreen, mask and mechanical layers (free items; w line width, h text height)
Top Overlay:
  drawing of 1851 lines, arcs and shapes, not listed
  text "CRASH PROOF" at -2206,69 h100
  text "+ve" at -2916,-1435 h30
  text "-ve" at -2922,-1618 h30
  text "Sig GND 5V" at -416,-1821 h30
  text "SIG  P GND" at -421,-1969 h30
  text "CLK SI A0 3.3V GND" at -686,-2131 h30